# Altium PCB A540R260_Arm6.PcbDoc (part 2 of 2)
Units mm, origin at the board's own origin, x right, y up, seen from the top; angles counter-clockwise.
Board outline 130.45 x 60.2 mm, 4 copper layers (Top Layer, 5V, GND, Bottom Layer), stack 1.741 mm thick; 110 components, 164 nets, 536 pads, 150 vias.
Unrouted connection lines stored in the file: 3.
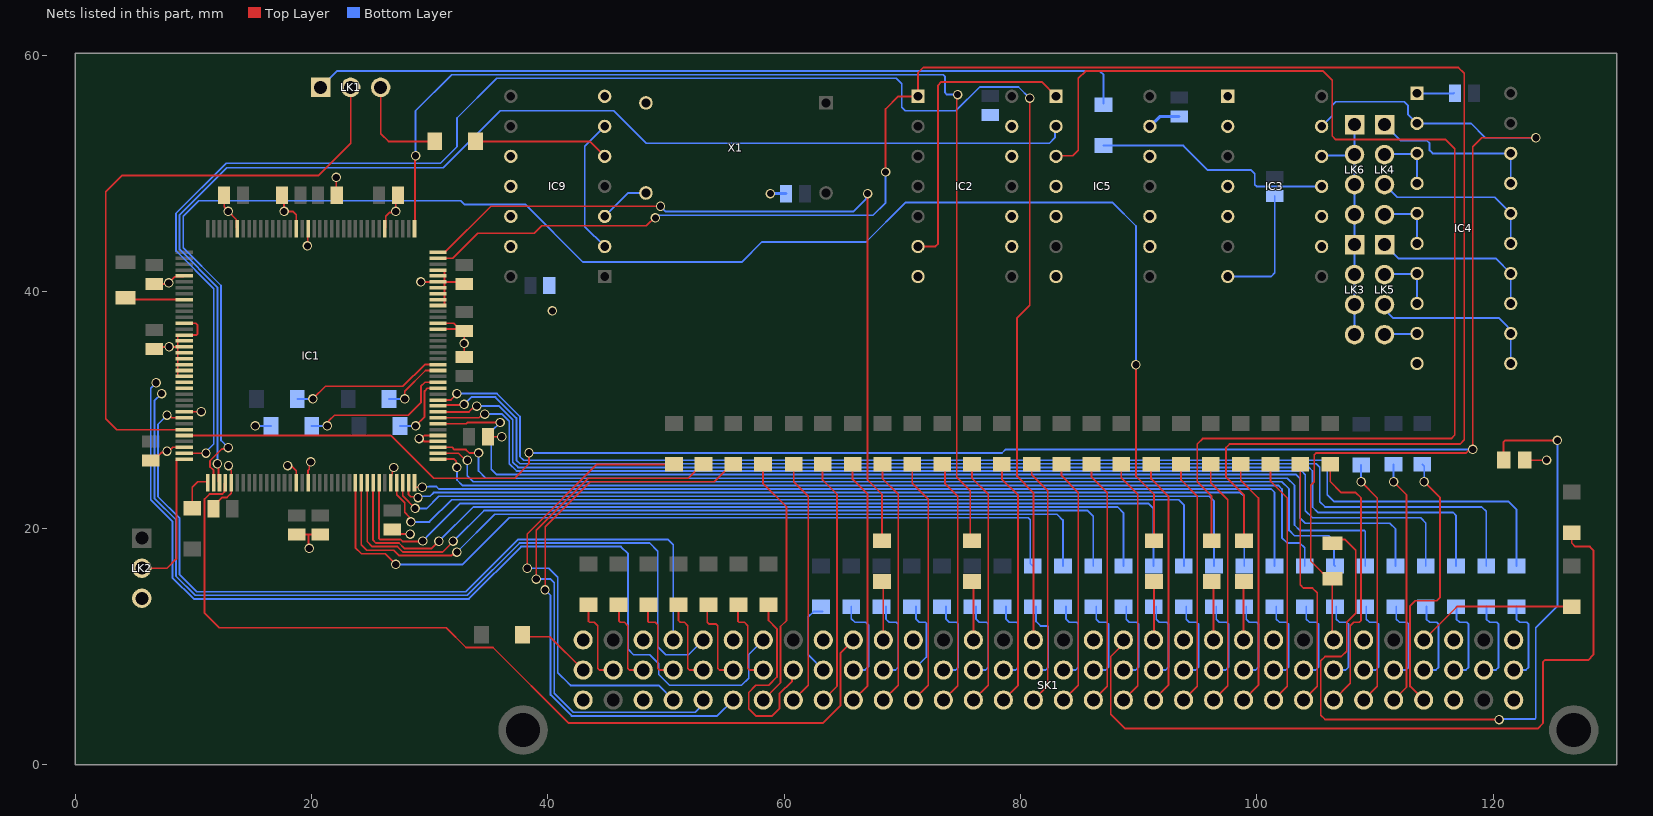
[diagram p4: the nets of this part, all layers, seen from the top]

## Via types
v1: diameter 0.8, hole 0.6, Top Layer to Bottom Layer, 150 vias

## Nets (pads, with @x,y where several pads share a name; then routed paths per layer and width w, separated by ;. In a path a pad name is that pad's centre, name@x,y a point inside that pad or via, vN(x,y) a via of type N, cw(c..) or ccw(c..) an arc to the next point about the centre after c; other vN are vias at no path point) (continued)
D15: IC1.26 R47.2 | length 68.9
  Top Layer w0.152: IC1.26@23.714,23.857 23.714,18.348 24.232,17.831 26.232,17.831 v1(27.127,16.935)
  Bottom Layer w0.152: v1(27.127,16.935) 32.785,16.935 36.728,20.879 80.645,20.879 80.823,20.701 80.823,17.015 R47.2@81.025,16.813
D16: IC1.27 R39.2 | length 70.5
  Top Layer w0.152: IC1.27@24.214,23.857 24.214,18.61 24.689,18.136 26.975,18.136 27.432,17.678 31.829,17.678 32.134,17.983 v1(32.309,17.983)
  Bottom Layer w0.152: v1(32.309,17.983) 35.509,21.184 83.083,21.184 83.583,20.684 R39.2@83.583,16.813
D17: IC1.28 R53.2 | length 72.7
  Top Layer w0.152: IC1.28@24.714,23.857 24.714,18.872 25.146,18.44 27.28,18.44 27.737,17.983 31.09,17.983 31.978,18.871 v1(31.978,18.902)
  Bottom Layer w0.152: v1(31.978,18.902) 32.008,18.902 34.595,21.488 85.674,21.488 86.141,21.021 R53.2@86.141,16.813
D18: IC1.29 R44.2 | length 74.8
  Top Layer w0.152: IC1.29@25.214,23.857 25.214,18.982 25.451,18.745 27.406,18.745 27.863,18.288 30.175,18.288 v1(30.785,18.898)
  Bottom Layer w0.152: v1(30.785,18.898) 33.68,21.793 88.214,21.793 88.7,21.308 R44.2@88.7,16.813
D19: IC1.30 R13.2 | length 76.7
  Top Layer w0.152: IC1.30@25.714,23.857 25.714,19.139 25.804,19.05 27.532,19.05 27.704,18.879 29.375,18.879 v1(29.413,18.917)
  Bottom Layer w0.152: v1(29.413,18.917) 30.052,19.555 32.595,22.098 90.805,22.098 91.258,21.645 R13.2@91.258,16.813
D20: IC1.33 R49.2 | length 75.3
  Top Layer w0.152: IC1.33@27.214,23.857 27.214,22.814 27.889,22.139 27.889,21.336 28.293,20.932 28.293,20.653 v1(28.417,20.529)
  Bottom Layer w0.152: v1(28.417,20.529) 29.977,20.529 31.852,22.403 93.396,22.403 93.816,21.983 R49.2@93.816,16.813
D21: IC1.34 R17.2 | length 76.3
  Top Layer w0.152: IC1.34@27.714,23.857 27.714,22.745 28.761,21.698 v1(28.761,21.669)
  Bottom Layer w0.152: v1(28.761,21.669) 29.746,21.669 30.785,22.708 95.961,22.708 96.374,22.295 R17.2@96.374,16.813
D22: IC1.35 R55.2 | length 78
  Top Layer w0.152: IC1.35@28.214,23.857 28.214,22.84 28.385,22.669 28.932,22.669 v1(29.014,22.587)
  Bottom Layer w0.152: v1(29.014,22.587) 29.138,22.711 30.027,22.711 30.328,23.012 98.603,23.012 98.932,22.683 R55.2@98.932,16.813
D23: IC1.36 R21.2 | length 79.5
  Top Layer w0.152: IC1.36@28.714,23.857 28.788,23.469 v1(29.375,23.469)
  Bottom Layer w0.152: v1(29.375,23.469) 29.954,23.522 30.58,23.522 30.785,23.317 101.194,23.317 101.49,23.021 R21.2@101.49,16.813
D24: IC1.37 R59.2 | length 81.3
  Top Layer w0.152: IC1.37@30.702,25.845 32.067,25.845 32.245,25.667 32.245,25.209 v1(32.309,25.146)
  Bottom Layer w0.152: v1(32.309,25.146) 32.309,24.079 32.766,23.622 101.803,23.622 102.108,23.317 102.108,19.202 102.565,18.745 103.632,18.745 104.048,18.329 R59.2@104.048,16.813
D25: IC1.38 R26.2 | length 84
  Top Layer w0.152: IC1.38@30.702,26.345 32.436,26.345 33.178,25.603 v1@33.223,25.603
  Bottom Layer w0.152: v1(33.186,25.746) 33.186,24.421 33.68,23.927 102.108,23.927 102.718,23.317 102.718,19.812 103.175,19.355 106.07,19.355 106.528,18.898 106.528,16.891 R26.2@106.606,16.813
D26: IC1.39 R62.2 | length 87.2
  Top Layer w0.152: IC1.39@30.702,26.845 31.901,26.845 32.096,26.65 33.065,26.65 33.349,26.365 v1(34.138,26.365)
  Bottom Layer w0.152: v1(34.138,26.365) 34.138,24.841 34.747,24.232 102.565,24.232 103.175,23.622 103.175,20.269 103.632,19.812 109.075,19.812 109.164,19.723 R62.2@109.164,16.813
D27: IC1.43 R32.2 | length 93.3
  Top Layer w0.152: IC1.43@30.702,28.845 33.112,28.845 33.179,28.911 33.223,28.956 35.944,28.956 v1(35.955,28.945)
  Bottom Layer w0.152: v1(35.955,28.945) 35.204,28.194 35.204,24.994 35.662,24.536 103.327,24.536 103.632,24.232 103.632,20.879 104.089,20.422 111.252,20.422 111.722,19.952 R32.2@111.722,16.813
D28: IC1.44 R23.2 | length 95
  Top Layer w0.152: IC1.44@30.702,29.345 34.174,29.345 34.483,29.654 v1(34.659,29.654)
  Bottom Layer w0.152: v1(34.659,29.654) 36.135,29.654 36.728,29.061 36.728,25.466 37.353,24.841 103.784,24.841 104.089,24.536 104.089,21.488 104.699,20.879 113.843,20.879 114.28,20.442 R23.2@114.28,16.813
D29: IC1.45 R38.2 | length 98.3
  Top Layer w0.152: IC1.45@30.702,29.845 33.327,29.845 33.81,30.328 v1(33.985,30.328)
  Bottom Layer w0.152: v1(33.985,30.328) 35.892,30.328 36.153,30.067 ; 36.151,30.069 37.033,29.187 37.033,25.592 37.48,25.146 104.394,25.146 104.699,24.841 104.699,21.793 105.156,21.336 116.586,21.336 116.838,21.084 R38.2@116.838,16.813
D30: IC1.46 R28.2 | length 101.4
  Top Layer w0.152: IC1.46@30.702,30.345 30.77,30.412 32.851,30.412 v1(32.918,30.48)
  Bottom Layer w0.152: v1(32.918,30.48) 33.528,31.09 35.561,31.09 35.606,31.045 37.338,29.313 37.338,25.756 37.643,25.451 105.004,25.451 105.308,25.146 105.308,22.25 105.766,21.793 119.024,21.793 119.396,21.421 R28.2@119.396,16.813
D31: IC1.47 R34.2 | length 103.8
  Top Layer w0.152: IC1.47@30.702,30.845 31.793,30.845 32.309,31.361 v1(32.309,31.394)
  Bottom Layer w0.152: v1(32.309,31.394) 35.688,31.394 37.643,29.439 37.643,26.06 37.948,25.756 105.613,25.756 105.943,25.425 105.943,22.835 106.528,22.25 121.31,22.25 121.954,21.607 R34.2@121.954,16.813
Dbe: IC1.4 SK1.C23 | length 76.7
  Top Layer w0.152: IC1.4@12.714,23.857 12.641,23.783 12.641,23.072 12.459,22.891 11.378,22.891 10.958,22.47 10.958,12.816 12.192,11.582 31.394,11.582 33.071,9.906 35.357,9.906 41.758,3.505 63.246,3.505 64.77,5.029 64.77,9.464 SK1.C23@65.847,10.541
FCLK: IC1.139 LK1.2 | length 53.4
  Top Layer w0.152: IC1.139@9.226,28.345 8.565,28.327 7.468,28.327 cw(c7.468,28.956) 7.466,28.327 5.486,28.327 cw(c5.486,28.956) 5.483,28.327 3.524,28.327 2.591,29.261 2.591,48.463 3.962,49.835 20.574,49.835 23.317,52.578 LK1.2@23.317,57.302
FiqN: IC1.131 SK1.C26 | length 82.9
  Bottom Layer w0.152: v1(6.858,32.309) 6.401,31.852 6.401,22.403 8.23,20.574 8.23,15.823 10.032,14.021 33.319,14.021 37.738,18.44 46.177,18.44 46.787,17.831 46.787,9.754 47.244,9.296 48.616,9.296 49.378,8.534 49.378,7.62 50.292,6.706 56.388,6.706 56.998,7.315 56.998,9.312 SK1.C26@58.227,10.541
freeFCLK: LK1.3 R98.2 | length 8.8
  Top Layer w0.152: LK1.3@25.857,57.302 25.857,53.391 26.518,52.73 R98.2@30.431,52.73
GND: C3.1 C4.1 C5.1 C6.2 C7.1 C10.1 C13.1 C15.1 C16.1 C17.1 C18.1 C19.1 C20.1 C21.1 C22.1 C23.1 C24.1 C25.1 Cz2.1 Cz3.1 Cz4.2 Cz5.1 IC1.5 IC1.16 IC1.18 IC1.32 IC1.40 IC1.41 IC1.59 IC1.60 IC1.63 IC1.64 IC1.65 IC1.66 IC1.67 IC1.68 IC1.69 IC1.78 IC1.91 IC1.93 IC1.103 IC1.113 IC1.121 IC1.123 IC1.124 IC1.125 IC1.126 IC1.127 IC1.128 IC1.129 IC1.130 IC1.136 IC1.142 IC2.7 IC2.9 IC2.10 IC2.12 IC2.13 IC3.1 IC3.2 IC3.4 IC3.5 IC3.7 IC3.9 IC3.10 IC4.1 IC4.10 IC5.4 IC5.5 IC5.7 IC5.9 IC5.10 IC5.12 IC5.13 IC9.7 IC9.10 IC9.11 IC9.12 IC9.13 LK2.3 R69.1 SK1.A1 SK1.A3 SK1.A30 SK1.A32 SK1.C1 SK1.C3 SK1.C6 SK1.C9 SK1.C12 SK1.C15 SK1.C21 SK1.C24 SK1.C27 SK1.C30 SK1.C32 X1.2 | length 85.6
  Top Layer w0.152: C17.1@6.401,25.718 6.835,26.151 7.06,26.151 7.302,26.394 7.648,26.394 v1(7.772,26.518) 7.933,26.518 8.26,26.845 IC1.142@9.226,26.845 ; C16.1@6.706,35.166 6.884,35.345 IC1.125@8.687,35.345 ; C13.1@6.706,40.653 7.836,40.653 7.925,40.742 v1(7.925,40.754) 8.442,41.271 9.153,41.271 IC1.113@9.226,41.345 ; IC1.136@9.226,29.845 9.239,29.858 10.655,29.858 v1(10.668,29.87) ; IC1.130@9.226,32.845 8.761,32.845 8.687,32.919 IC1.129@8.687,33.419 ; IC1.129@9.226,33.345 8.761,33.345 IC1.129@8.687,33.419 ; IC1.125@9.226,35.345 IC1.125@8.687,35.345 ; IC1.121@9.226,37.345 10.204,37.345 10.363,37.186 10.363,36.434 10.274,36.345 IC1.123@9.226,36.345 8.76,36.345 8.687,36.271 IC1.125@8.687,35.345 ; C18.1@11.697,21.641 11.697,21.866 12.417,22.586 12.674,22.586 12.692,22.604 12.851,22.604 13.214,22.968 13.214,24.884 12.979,25.119 v1(12.979,25.294) ; C7.1@12.611,48.158 12.611,47.195 12.954,46.852 v1(12.954,46.806) 13.641,46.117 13.641,45.407 IC1.103@13.714,45.333 ; C5.1@17.488,48.158 17.678,47.968 v1(17.678,46.806) ; v1(17.678,46.806) 17.697,46.787 18.44,46.787 18.714,46.513 IC1.93@18.714,45.333 ; v1(17.983,25.298) 18.107,25.174 18.412,25.174 18.714,24.872 IC1.16@18.714,23.857 ; C19.1@18.745,19.469 19.736,19.469 ; v1(19.66,43.891) 19.687,43.919 19.687,45.305 IC1.91@19.714,45.333 ; IC1.18@19.714,23.857 19.714,24.903 19.815,25.004 19.815,25.483 v1(19.939,25.607) ; v1(19.812,18.288) 19.736,18.364 19.736,19.469 ; C20.1@20.726,19.469 19.736,19.469 ; v1(22.098,49.682) 22.098,48.196 C4.1@22.136,48.158 ; IC1.78@26.214,45.333 26.288,45.407 26.288,46.405 26.607,46.723 27.045,46.723 v1(27.127,46.806) 27.127,47.968 C3.1@27.318,48.158 ; IC1.32@26.714,23.857 26.788,24.518 v1(26.963,25.137) ; C21.1@26.822,19.888 27.204,19.507 v1(28.346,19.507) ; v1(29.108,27.584) v1@29.284,27.584 ; v1(29.261,40.843) IC1.67@31.241,40.844 ; IC1.40@30.702,27.345 29.523,27.345 v1@29.284,27.584 ; IC1.41@30.702,27.845 29.544,27.845 v1@29.284,27.584 ; IC1.59@30.702,36.845 C24.1@32.539,36.845 ; IC1.60@30.702,37.345 31.692,37.345 31.699,37.338 32.046,37.338 C24.1@32.539,36.845 ; IC1.69@30.702,41.845 31.168,41.845 31.242,41.771 31.242,41.345 IC1.67@31.242,40.845 ; 31.242,39.014 31.242,39.345 31.242,39.845 31.242,40.345 IC1.67@31.242,40.845 ; C23.1@32.918,34.48 v1(32.918,35.643) 32.918,35.662 C24.1@32.918,36.69 32.693,36.69 C24.1@32.539,36.845 ; C25.1@32.918,40.653 32.726,40.845 IC1.67@31.242,40.845 ; C22.1@34.938,27.737 v1(36.1,27.737) ; C6.2@122.668,25.756 v1(124.511,25.756) ; IC1.129@8.687,33.419 IC1.125@8.687,35.345
  Bottom Layer w0.152: v1(15.24,28.651) R69.1@16.563,28.651 ; IC3.7@97.528,41.3 101.194,41.3 101.498,41.605 C15.1@101.498,48.12 ; IC4.1@113.538,56.794 116.65,56.794 C10.1@116.7,56.845
  Bottom Layer w0.254: v1(58.826,48.311) Cz3.1@60.16,48.311 ; IC5.13@90.94,54 91.765,54.826 Cz5.1@93.421,54.826
  other v1: 7.95,35.35 40.383,38.384
IrqN: IC1.132 SK1.C28 | length 72.7
  Bottom Layer w0.152: v1(7.315,31.394) 6.706,30.785 6.706,22.529 8.534,20.7 8.534,15.95 10.159,14.326 33.193,14.326 37.612,18.745 48.616,18.745 49.301,18.059 49.301,9.982 49.987,9.296 51.902,9.296 SK1.C28@53.147,10.541
ixSEQ: IC5.3 R40.2 | length 100.8
  Top Layer w0.152: IC5.3@83,51.46 83.05,51.511 84.43,51.511 84.887,51.968 84.887,58.064 85.496,58.674 105.613,58.674 106.375,57.912 106.375,53.188 106.68,52.883 115.976,52.883 116.738,52.121 116.738,27.889 116.434,27.584 95.402,27.584 94.945,27.127 94.945,23.927 96.164,22.708 R40.2@96.164,18.946
LOCK: IC1.73 R63.2 | length 97.1
  Top Layer w0.152: IC1.73@28.714,45.333 28.759,45.377 28.759,51.467 v1(28.804,51.511) ; v1(74.676,56.693) 74.598,56.615 74.598,24.31 75.743,23.165 75.743,19.099 R63.2@75.895,18.946
  Bottom Layer w0.152: v1@28.804,51.359 28.804,55.321 31.852,58.369 73.457,58.369 73.609,58.217 73.609,56.845 73.762,56.693 v1(74.676,56.693)
Mclk: IC1.140 IC3.13 IC4.2 R2.1 SK1.C7 | length 195
  Top Layer w0.152: IC1.140@9.226,27.845 11.386,27.845 26.714,27.845 26.751,27.808 30.328,24.232 37.186,24.232 38.405,25.451 v1(38.405,26.384) ; SK1.C7@106.487,10.541 106.375,10.653 R2.1@106.375,15.721 105.876,16.22 105.548,16.22 104.546,17.221 104.546,23.622 104.851,23.927 104.851,26.213 105.004,26.365 117.697,26.365 117.878,26.546 118.138,26.546 v1(118.262,26.67) 118.262,52.273 119.024,53.035 v1(123.596,53.035)
  Bottom Layer w0.152: v1(38.405,26.384) 38.424,26.365 39.608,26.365 39.734,26.365 78.424,26.365 78.729,26.67 v1(118.262,26.67) ; IC3.13@105.468,54 106.375,54.907 106.375,55.778 106.68,56.083 112.471,56.083 112.776,55.778 112.776,55.016 IC4.2@113.538,54.254 118.11,54.254 119.329,53.035 v1(123.596,53.035)
MSE: IC1.1 R76.1 | length 3.3
  Top Layer w0.152: R76.1@9.906,21.689 9.906,23.47 10.363,23.927 11.144,23.927 IC1.1@11.214,23.857
nBW: IC1.72 R60.2 | length 68.9
  Top Layer w0.152: IC1.72@30.702,43.345 31.29,43.345 35.189,47.244 v1(49.53,47.244) ; v1(67.056,48.311) 67.056,24.079 68.275,22.86 R60.2@68.275,18.946
  Bottom Layer w0.152: v1(49.53,47.244) 49.987,46.787 65.837,46.787 66.932,47.882 66.932,48.187 v1(67.056,48.311) v1@66.98,48.235
NetC6_1: C6.1 R2.2 | length 67.3
  Top Layer w0.152: R2.2@106.375,18.721 106.704,19.05 107.442,19.05 108.356,18.136 108.356,12.802 107.594,12.04 107.594,9.601 107.137,9.144 105.766,9.144 105.401,8.78 105.401,4.174 105.766,3.81 v1@120.427,3.81 ; C6.1@120.868,25.756 120.853,25.77 120.853,27.28 121.006,27.432 v1(125.425,27.432)
  Bottom Layer w0.152: v1@120.396,3.848 123.507,3.848 123.596,3.938 123.596,11.582 125.425,13.411 v1(125.425,27.432)
  other v1: 120.498,3.806
NetIC1_117: IC1.117 R99.2 | length 5
  Top Layer w0.152: R99.2@4.267,39.496 4.418,39.345 IC1.117@9.226,39.345
NetIC3_12: IC3.12 LK3.1 LK3.2 LK3.3 LK3.4 LK6.1 LK6.2 LK6.3 LK6.4 | length 20.6
  Bottom Layer w0.152: IC3.12@105.468,51.46 105.545,51.537 108.179,51.537 LK6.2@108.255,51.613 ; LK3.4@108.255,36.373 LK3.3@108.255,38.913 LK3.2@108.255,41.453 LK3.1@108.255,43.993 LK6.4@108.255,46.533 LK6.3@108.255,49.073 LK6.2@108.255,51.613 ; LK6.1@108.255,54.153 LK6.2@108.255,51.613
NetIC4_3: IC4.3 IC4.4 LK4.2 | length 5.3
  Bottom Layer w0.152: LK4.2@110.795,51.613 110.846,51.664 113.487,51.664 IC4.3@113.538,51.714 IC4.4@113.538,49.174
NetIC4_5: IC4.5 IC4.6 LK4.4 | length 5.3
  Bottom Layer w0.152: LK4.4@110.795,46.533 110.846,46.584 113.487,46.584 IC4.5@113.538,46.634 IC4.6@113.538,44.094
NetIC4_7: IC4.7 IC4.8 LK5.2 | length 5.3
  Bottom Layer w0.152: LK5.2@110.795,41.453 110.846,41.504 113.487,41.504 IC4.7@113.538,41.554 IC4.8@113.538,39.014
NetIC4_9: IC4.9 LK5.4 | length 2.8
  Bottom Layer w0.152: LK5.4@110.795,36.373 110.846,36.424 113.487,36.424 IC4.9@113.538,36.474
NetIC4_11: IC4.11 IC4.12 LK5.3 | length 14.7
  Bottom Layer w0.152: LK5.3@110.795,38.913 110.795,38.508 111.178,38.124 111.178,38.111 111.494,37.795 120.459,37.795 121.22,37.034 121.22,36.997 121.478,36.739 IC4.11@121.478,33.934
NetIC4_13: IC4.13 IC4.14 LK5.1 | length 14.2
  Bottom Layer w0.152: LK5.1@110.795,43.993 111.963,42.824 120.208,42.824 IC4.14@121.478,41.554 IC4.13@121.478,39.014
NetIC4_15: IC4.15 IC4.16 LK4.3 | length 14.2
  Bottom Layer w0.152: LK4.3@110.795,49.073 111.862,48.006 120.106,48.006 IC4.16@121.478,46.634 IC4.15@121.478,44.094
NetIC4_17: IC4.17 IC4.18 LK4.1 | length 14.6
  Bottom Layer w0.152: LK4.1@110.795,54.153 112.156,52.792 114.391,52.792 114.605,52.578 114.605,51.968 114.859,51.714 IC4.18@121.478,51.714 IC4.17@121.478,49.174
NetIC9_2: IC9.2 IC9.6 | length 11.5
  Bottom Layer w0.152: IC9.2@44.806,43.84 43.129,45.517 43.129,52.324 IC9.6@44.806,54
NetIC9_5: IC9.5 R98.1 | length 11.5
  Top Layer w0.152: R98.1@33.881,52.73 43.536,52.73 IC9.5@44.806,51.46
nHW: R1.1 SK1.C4 | length 13.1
  Top Layer w0.152: SK1.C4@114.107,10.541 116.929,13.363 R1.1@126.035,13.363
nMREQ: IC1.2 R50.2 | length 138.6
  Top Layer w0.152: IC1.2@11.714,23.857 11.714,24.887 11.411,25.19 11.411,25.711 12.398,26.698 12.83,26.698 v1(12.954,26.822) ; v1(89.764,33.833) 89.764,24.384 91.288,22.86 R50.2@91.288,18.946
  Bottom Layer w0.152: v1(12.954,26.822) 12.344,27.432 12.344,40.538 9.144,43.739 9.144,46.382 10.463,47.701 32.614,47.701 32.918,47.396 38.1,47.396 42.977,42.52 56.413,42.52 58.109,44.215 66.923,44.215 70.256,47.549 87.782,47.549 89.764,45.568 v1(89.764,33.833)
nRESET: IC1.137 SK1.C29 | length 68.5
  Top Layer w0.152: v1(7.772,29.566) 7.948,29.566 8.168,29.345 IC1.137@9.226,29.345
  Bottom Layer w0.152: v1(7.772,29.566) 7.01,28.804 7.01,22.655 8.839,20.827 8.839,16.076 10.285,14.63 33.066,14.63 37.486,19.05 50.14,19.05 50.607,18.583 SK1.C29@50.607,10.541
nRW: IC1.71 IC2.1 R56.2 | length 159.5
  Top Layer w0.152: IC1.71@30.702,42.845 31.942,42.845 34.055,44.958 38.862,44.958 39.491,45.587 48.33,45.587 v1@49.073,46.33 ; v1(68.58,50.14) 68.58,55.474 69.647,56.54 IC2.1@71.316,56.54 71.316,58.514 71.78,58.979 117.043,58.979 117.543,58.479 117.543,27.474 117.196,27.127 97.688,27.127 97.384,26.822 97.384,24.321 97.473,24.232 98.908,22.797 R56.2@98.908,18.946
  Bottom Layer w0.152: v1(49.097,46.25) 49.33,46.482 67.513,46.482 68.58,47.549 v1(68.58,50.14)
nTRST: IC1.50 R69.2 | length 13.2
  Top Layer w0.152: v1(21.336,28.651) 21.46,28.775 21.46,29.08 21.946,29.566 28.194,29.566 29.261,30.632 29.261,32.004 29.602,32.345 IC1.50@30.702,32.345
  Bottom Layer w0.152: R69.2@20.013,28.651 v1(21.336,28.651)
nVIDC_Write_maybe: IC2.6 IC5.1 | length 25.8
  Top Layer w0.152: IC2.6@71.316,43.84 72.796,43.84 73,44.044 73,57.455 73.304,57.76 81.78,57.76 IC5.1@83,56.54
nWAIT: IC1.143 SK1.C17 | length 152.5
  Top Layer w0.152: IC1.143@9.226,26.345 9.228,26.347 11.073,26.347 v1(11.075,26.348) ; v1(80.772,56.388) 80.772,38.862 79.705,37.795 79.705,24.384 81.087,23.002 SK1.C17@81.087,10.541
  Bottom Layer w0.152: v1@10.973,26.365 11.735,27.127 11.735,40.26 8.534,43.46 8.534,46.634 12.783,50.883 30.918,50.883 32.309,52.273 32.309,54.712 35.662,58.064 69.494,58.064 69.952,57.607 69.952,55.626 70.256,55.321 74.524,55.321 76.536,57.334 79.826,57.334 v1(80.772,56.388)
OscClk: IC9.3 X1. | length 4.3
  Bottom Layer w0.152: IC9.3@44.806,46.38 46.792,48.367 X1.@48.297,48.367
SEQ: IC1.3 IC5.2 | length 104.1
  Top Layer w0.152: v1(12.04,25.451) 12.141,25.35 12.141,23.931 IC1.3@12.214,23.857
  Bottom Layer w0.152: v1(12.04,25.451) 12.04,40.386 8.839,43.586 8.839,46.508 12.839,50.508 31.153,50.508 35.966,55.321 45.568,55.321 48.311,52.578 82.448,52.578 82.906,53.035 82.906,53.906 IC5.2@83,54
SNA: IC1.144 LK2.2 | length 12.3
  Top Layer w0.152: LK2.2@5.639,16.612 7.772,16.612 8.565,17.404 8.565,25.771 8.639,25.845 IC1.144@9.226,25.845
syncFCLK: LK1.1 R52.1 | length 69.4
  Bottom Layer w0.152: LK1.1@20.777,57.302 22.149,58.674 86.716,58.674 87.02,58.369 R52.1@87.02,55.931
TCK: IC1.53 R45.2 | length 13.1
  Top Layer w0.152: v1(20.117,30.937) 21.184,32.004 27.737,32.004 29.578,33.845 IC1.53@30.702,33.845
  Bottom Layer w0.152: R45.2@18.794,30.937 v1(20.117,30.937)
TDI: IC1.49 R68.2 | length 5.8
  Top Layer w0.152: v1(28.804,28.651) 29.566,29.413 29.566,31.603 29.807,31.845 IC1.49@30.702,31.845
  Bottom Layer w0.152: R68.2@27.481,28.651 v1(28.804,28.651)
TMS: IC1.52 R83.2 | length 5.5
  Top Layer w0.152: v1(27.889,30.937) 27.889,31.591 29.643,33.345 IC1.52@30.702,33.345
  Bottom Layer w0.152: R83.2@26.566,30.937 v1(27.889,30.937)
xA0: R_A0.1 SK1.A4 | length 23.2
  Top Layer w0.152: SK1.A4@114.107,5.461 112.959,6.609 112.959,13.442 113.386,13.868 115.214,13.868 115.495,14.149 115.495,22.579 v1(114.148,23.927)
  Bottom Layer w0.152: R_A0.1@113.995,25.402 114.148,25.25 v1(114.148,23.927)
xA1: R65.1 SK1.A5 | length 20.8
  Top Layer w0.152: v1(111.557,23.927) 112.652,22.832 112.652,6.546 SK1.A5@111.567,5.461
  Bottom Layer w0.152: v1(111.557,23.927) R65.1@111.557,25.402
xA2: R8.1 SK1.A6 | length 20.9
  Top Layer w0.152: v1(108.814,23.927) 110.185,22.555 110.185,6.619 SK1.A6@109.027,5.461
  Bottom Layer w0.152: v1(108.814,23.927) R8.1@108.814,25.354
xA3: R29.1 SK1.A7 | length 23
  Top Layer w0.152: R29.1@106.197,25.402 106.197,23.952 107.137,23.012 108.356,23.012 108.814,22.555 108.814,12.192 108.661,12.04 108.204,12.04 107.899,11.735 107.899,6.873 SK1.A7@106.487,5.461
xA4: R10.1 SK1.A8 | length 21.5
  Top Layer w0.152: R10.1@103.672,25.402 103.672,15.2 103.937,14.935 104.699,14.935 105.096,14.538 105.096,6.61 SK1.A8@103.947,5.461
xA5: R35.1 SK1.A9 | length 21
  Top Layer w0.152: R35.1@101.146,25.402 101.146,23.974 102.565,22.555 102.565,6.619 SK1.A9@101.407,5.461
xA6: R14.1 SK1.A10 | length 21.1
  Top Layer w0.152: R14.1@98.621,25.402 98.621,24.061 100.127,22.555 100.127,6.721 SK1.A10@98.867,5.461
xA7: R41.1 SK1.A11 | length 21
  Top Layer w0.152: R41.1@96.095,25.402 96.095,24.238 96.095,24.148 96.095,23.843 97.536,22.403 97.536,6.67 SK1.A11@96.327,5.461
xA8: Rx9.1 SK1.A12 | length 21
  Top Layer w0.152: Rx9.1@93.57,25.402 93.57,24.083 94.945,22.708 94.945,6.619 SK1.A12@93.787,5.461
xA9: R46.1 SK1.A13 | length 21.1
  Top Layer w0.152: R46.1@91.044,25.402 91.044,24.17 92.507,22.708 92.507,6.721 SK1.A13@91.247,5.461
xA10: R24.1 SK1.A14 | length 21
  Top Layer w0.152: R24.1@88.519,25.402 88.519,24.257 89.916,22.86 89.916,6.67 SK1.A14@88.707,5.461
xA11: R5z.1 SK1.A15 | length 21
  Top Layer w0.152: R5z.1@85.993,25.402 85.993,24.344 87.325,23.012 87.325,6.619 SK1.A15@86.167,5.461
xA12: R30.1 SK1.A16 | length 21.1
  Top Layer w0.152: R30.1@83.468,25.402 83.468,24.431 84.887,23.012 84.887,6.721 SK1.A16@83.627,5.461
xA13: R57.1 SK1.A17 | length 21
  Top Layer w0.152: R57.1@80.943,25.402 80.943,24.518 82.296,23.165 82.296,6.67 SK1.A17@81.087,5.461
xA14: R36.1 SK1.A18 | length 21
  Top Layer w0.152: R36.1@78.417,25.402 78.417,24.148 79.785,22.78 79.785,6.699 SK1.A18@78.547,5.461
xA15: R61.1 SK1.A19 | length 21
  Top Layer w0.152: R61.1@75.892,25.402 75.892,24.235 77.267,22.86 77.267,6.721 SK1.A19@76.007,5.461
xA16: R5.1 SK1.A20 | length 21
  Top Layer w0.152: R5.1@73.366,25.402 73.609,25.159 73.609,23.774 74.676,22.708 74.676,6.67 SK1.A20@73.467,5.461
xA17: R64.1 SK1.A21 | length 21
  Top Layer w0.152: R64.1@70.841,25.402 70.841,23.8 72.18,22.46 72.18,6.714 SK1.A21@70.927,5.461
xA18: R7.1 SK1.A22 | length 21
  Top Layer w0.152: R7.1@68.315,25.402 68.315,24.192 69.647,22.86 69.647,6.721 SK1.A22@68.387,5.461
xA19: R66.1 SK1.A23 | length 21
  Top Layer w0.152: R66.1@65.79,25.402 65.79,24.126 67.056,22.86 67.056,6.67 SK1.A23@65.847,5.461
xA20: R9.1 SK1.A24 | length 20.9
  Top Layer w0.152: R9.1@63.264,25.402 63.246,25.384 63.246,24.079 64.465,22.86 64.465,6.619 SK1.A24@63.307,5.461
xA21: R67.1 SK1.A25 | length 21
  Top Layer w0.152: SK1.A25@60.767,5.461 62.027,6.721 62.027,22.708 60.808,23.927 R67.1@60.808,25.402
xA22: R11.1 SK1.A26 | length 21.6
  Top Layer w0.152: R11.1@58.213,25.402 58.217,25.399 58.217,23.774 60.198,21.793 60.198,12.192 59.685,11.679 59.685,6.919 SK1.A26@58.227,5.461
xA23: R3.1 SK1.A27 | length 49.3
  Top Layer w0.152: v1(39.757,14.783) 39.776,14.802 39.776,20.117 43.586,23.927 54.087,23.927 55.563,25.402 R3.1@55.688,25.402
  Bottom Layer w0.152: v1(39.757,14.783) 40.234,14.307 40.234,5.891 42.01,4.115 54.341,4.115 SK1.A27@55.687,5.461
xA24: R15.1 SK1.A28 | length 45.5
  Top Layer w0.152: v1(39.014,15.697) 39.014,19.838 43.408,24.232 51.867,24.232 53.037,25.402 R15.1@53.162,25.402
  Bottom Layer w0.152: v1(39.014,15.697) 40.234,15.697 40.538,15.392 40.538,6.018 42.136,4.42 52.489,4.42 53.147,5.078 SK1.A28@53.147,5.461
xA25: R4.1 SK1.A29 | length 39.5
  Top Layer w0.152: v1(38.252,16.612) 38.252,19.507 44.147,25.402 R4.1@50.673,25.402
  Bottom Layer w0.152: v1(38.252,16.612) 40.081,16.612 40.843,15.85 40.843,7.772 41.758,6.858 41.922,6.694 49.374,6.694 SK1.A29@50.607,5.461
xD0: R43.1 SK1.B32 | length 6.4
  Top Layer w0.152: R43.1@37.844,10.973 37.996,10.82 40.168,10.82 SK1.B32@42.987,8.001
xD1: R12.1 SK1.B31 | length 7.3
  Top Layer w0.152: R12.1@43.434,13.515 43.434,12.129 43.523,12.04 43.941,12.04 44.221,11.76 44.221,8.142 44.361,8.001 SK1.B31@45.527,8.001
xD2: R48.1 SK1.B30 | length 7.3
  Top Layer w0.152: R48.1@45.974,13.515 46.025,13.464 46.025,12.129 46.114,12.04 46.482,12.04 46.761,11.761 46.761,8.142 46.901,8.001 SK1.B30@48.067,8.001
xD3: R16.1 SK1.B29 | length 7.4
  Top Layer w0.152: R16.1@48.514,13.515 48.463,13.464 48.463,12.129 48.552,12.04 49.073,12.04 49.301,11.812 49.301,11.76 49.301,8.142 49.441,8.001 SK1.B29@50.607,8.001
xD4: R54.1 SK1.B28 | length 7.3
  Top Layer w0.152: R54.1@51.054,13.515 51.054,12.192 51.206,12.04 51.561,12.04 51.841,11.76 51.841,8.142 51.981,8.001 SK1.B28@53.147,8.001
xD5: R20.1 SK1.B27 | length 7.5
  Top Layer w0.152: R20.1@53.594,13.515 53.492,13.413 53.492,12.04 53.645,11.887 54.253,11.887 54.381,11.76 54.381,8.142 54.521,8.001 SK1.B27@55.687,8.001
xD6: R58.1 SK1.B26 | length 7.4
  Top Layer w0.152: R58.1@56.134,13.515 56.083,13.464 56.083,12.129 56.172,12.04 56.641,12.04 56.921,11.76 56.921,8.142 57.061,8.001 SK1.B26@58.227,8.001
xD7: R25.1 SK1.B25 | length 17.6
  Top Layer w0.152: R25.1@58.674,13.515 58.674,12.192 59.38,11.486 59.38,7.412 58.674,6.706 57.607,6.706 56.998,6.096 56.998,4.724 57.607,4.115 58.979,4.115 59.588,4.724 59.588,5.975 60.665,7.052 60.665,7.899 SK1.B25@60.767,8.001
xD8: R18.1 SK1.B24 | length 6.4
  Bottom Layer w0.152: R18.1@63.246,12.954 62.484,12.954 62.027,12.497 62.027,9.281 SK1.B24@63.307,8.001
xD9: R31.1 SK1.B23 | length 7.6
  Bottom Layer w0.152: R31.1@65.677,13.363 65.677,12.352 65.989,12.04 66.904,12.04 67.142,11.801 67.142,8.316 66.827,8.001 SK1.B23@65.847,8.001
xD10: R22.1 SK1.B22 | length 7.3
  Bottom Layer w0.152: SK1.B22@68.387,8.001 69.418,8.001 69.647,8.23 69.647,11.887 69.494,12.04 68.885,12.04 68.614,12.31 R22.1@68.614,13.363
xD11: R37.1 SK1.B21 | length 6.5
  Bottom Layer w0.152: SK1.B21@70.927,8.001 72.036,9.11 72.036,11.95 71.947,12.04 71.425,12.04 71.154,12.31 R37.1@71.154,13.363
xD12: R27.1 SK1.B20 | length 7.3
  Bottom Layer w0.152: SK1.B20@73.467,8.001 74.498,8.001 74.727,8.23 74.727,11.887 74.574,12.04 73.965,12.04 73.694,12.31 R27.1@73.694,13.363
xD13: R42.1 SK1.B19 | length 7.3
  Bottom Layer w0.152: SK1.B19@76.007,8.001 77.038,8.001 77.267,8.23 77.267,11.887 77.114,12.04 76.505,12.04 76.234,12.31 R42.1@76.234,13.363
xD14: R33.1 SK1.B18 | length 7.3
  Bottom Layer w0.152: SK1.B18@78.547,8.001 79.578,8.001 79.807,8.23 79.807,11.887 79.654,12.04 79.045,12.04 78.774,12.31 R33.1@78.774,13.363
xD15: R47.1 SK1.B17 | length 7.2
  Bottom Layer w0.152: SK1.B17@81.087,8.001 82.118,8.001 82.347,8.23 82.347,11.646 82.258,11.735 81.686,11.735 81.314,12.107 R47.1@81.314,13.363
xD16: R39.1 SK1.B16 | length 7.3
  Bottom Layer w0.152: SK1.B16@83.627,8.001 84.658,8.001 84.887,8.23 84.887,11.887 84.734,12.04 84.125,12.04 83.854,12.31 R39.1@83.854,13.363
xD17: R53.1 SK1.B15 | length 7.3
  Bottom Layer w0.152: SK1.B15@86.167,8.001 87.198,8.001 87.427,8.23 87.427,11.887 87.274,12.04 86.665,12.04 86.394,12.31 R53.1@86.394,13.363
xD18: R44.1 SK1.B14 | length 7.3
  Bottom Layer w0.152: SK1.B14@88.707,8.001 89.738,8.001 89.967,8.23 89.967,11.887 89.814,12.04 89.205,12.04 88.934,12.31 R44.1@88.934,13.363
xD19: R13.1 SK1.B13 | length 7.3
  Bottom Layer w0.152: SK1.B13@91.247,8.001 92.278,8.001 92.507,8.23 92.507,11.887 92.354,12.04 91.745,12.04 91.474,12.31 R13.1@91.474,13.363
xD20: R49.1 SK1.B12 | length 7.3
  Bottom Layer w0.152: SK1.B12@93.787,8.001 94.818,8.001 95.047,8.23 95.047,11.887 94.894,12.04 94.285,12.04 94.014,12.31 R49.1@94.014,13.363
xD21: R17.1 SK1.B11 | length 7.3
  Bottom Layer w0.152: SK1.B11@96.327,8.001 97.358,8.001 97.587,8.23 97.587,11.887 97.434,12.04 96.825,12.04 96.554,12.31 R17.1@96.554,13.363
xD22: R55.1 SK1.B10 | length 7.3
  Bottom Layer w0.152: SK1.B10@98.867,8.001 99.898,8.001 100.127,8.23 100.127,11.887 99.974,12.04 99.365,12.04 99.094,12.31 R55.1@99.094,13.363
xD23: R21.1 SK1.B9 | length 7.3
  Bottom Layer w0.152: SK1.B9@101.407,8.001 102.438,8.001 102.667,8.23 102.667,11.887 102.514,12.04 101.905,12.04 101.634,12.31 R21.1@101.634,13.363
xD24: R59.1 SK1.B8 | length 7.3
  Bottom Layer w0.152: SK1.B8@103.947,8.001 104.978,8.001 105.207,8.23 105.207,11.887 105.054,12.04 104.445,12.04 104.174,12.31 R59.1@104.174,13.363
xD25: R26.1 SK1.B7 | length 7.3
  Bottom Layer w0.152: SK1.B7@106.487,8.001 107.518,8.001 107.747,8.23 107.747,11.887 107.594,12.04 106.985,12.04 106.714,12.31 R26.1@106.714,13.363
xD26: R62.1 SK1.B6 | length 7.3
  Bottom Layer w0.152: SK1.B6@109.027,8.001 110.058,8.001 110.287,8.23 110.287,11.887 110.134,12.04 109.525,12.04 109.254,12.31 R62.1@109.254,13.363
xD27: R32.1 SK1.B5 | length 7.3
  Bottom Layer w0.152: SK1.B5@111.567,8.001 112.598,8.001 112.827,8.23 112.827,11.887 112.674,12.04 112.065,12.04 111.794,12.31 R32.1@111.794,13.363
xD28: R23.1 SK1.B4 | length 7.3
  Bottom Layer w0.152: SK1.B4@114.107,8.001 115.138,8.001 115.367,8.23 115.367,11.887 115.214,12.04 114.605,12.04 114.334,12.31 R23.1@114.334,13.363
xD29: R38.1 SK1.B3 | length 7.3
  Bottom Layer w0.152: SK1.B3@116.647,8.001 117.678,8.001 117.907,8.23 117.907,11.887 117.754,12.04 117.145,12.04 116.874,12.31 R38.1@116.874,13.363
xD30: R28.1 SK1.B2 | length 7.3
  Bottom Layer w0.152: SK1.B2@119.187,8.001 120.218,8.001 120.447,8.23 120.447,11.887 120.294,12.04 119.685,12.04 119.414,12.31 R28.1@119.414,13.363
xD31: R34.1 SK1.B1 | length 7.3
  Bottom Layer w0.152: SK1.B1@121.727,8.001 122.758,8.001 122.987,8.23 122.987,11.887 122.834,12.04 122.225,12.04 121.954,12.31 R34.1@121.954,13.363
xFCLK: IC3.11 R52.2 | length 20.4
  Bottom Layer w0.152: R52.2@87.02,52.377 93.775,52.377 95.847,50.305 99.504,50.305 99.822,49.987 99.822,49.073 99.974,48.92 IC3.11@105.468,48.92
xLock: R63.1 SK1.C19 | length 5
  Top Layer w0.152: R63.1@75.895,15.496 76.007,15.384 SK1.C19@76.007,10.541
xMreqN: R50.1 SK1.C13 | length 5
  Top Layer w0.152: SK1.C13@91.288,10.582 R50.1@91.288,15.496
  Top Layer w0.254: SK1.C13@91.247,10.541 SK1.C13@91.288,10.582
xnBW: R60.1 SK1.C22 | length 5
  Top Layer w0.152: R60.1@68.275,15.496 68.387,15.384 SK1.C22@68.387,10.541
xnRW: R56.1 SK1.C10 | length 5
  Top Layer w0.152: SK1.C10@98.867,10.541 R56.1@98.867,15.456
  Top Layer w0.254: R56.1@98.867,15.456 R56.1@98.908,15.496
xSeq: R40.1 SK1.C11 | length 5
  Top Layer w0.152: SK1.C11@96.327,10.541 R40.1@96.327,15.334
  Top Layer w0.254: R40.1@96.164,15.496 R40.1@96.327,15.334
xSpvmd: R78.1 SK1.C14 | length 65.5
  Top Layer w0.152: SK1.C14@88.707,10.541 88.707,10.221 87.63,9.144 87.63,4.267 88.849,3.048 123.749,3.048 124.206,3.505 124.206,8.687 124.358,8.839 128.016,8.839 128.473,9.296 128.473,18.136 128.168,18.44 126.949,18.44 126.644,18.745 R78.1@126.644,19.611
pads on no net: IC1.48 IC1.54 IC1.55 IC1.56 IC1.57 IC1.58 IC1.62 IC1.109 IC1.110 IC1.111 IC1.114 IC1.115 IC1.116 IC1.118 IC1.119 IC1.120 IC1.133 IC1.134 IC1.135 IC2.3 IC2.8 IC2.11 IC3.3 IC3.6 IC3.8 IC5.6 IC5.8 IC5.11 IC9.8 IC9.9 SK1.C5 SK1.C18 SK1.MH1 SK1.MH2 X1.1

## Polygon pours and split planes (outlines as drawn)
5V on 5V "5V_L02_P003" (solid, pour order 3): -0.055,-0.035 130.4,-0.035 130.4,60.163 -0.055,60.163
5V on 5V "NONET_L-01_P-001" (solid, shelved, pour order 0): 0,0 130.454,0 130.454,60.198 0,60.198
GND on GND "GND_L03_P004" (solid, pour order 4): 0,0 130.454,0 130.454,60.198 0,60.198
GND on GND "NONET_L-01_P-001" (solid, shelved, pour order 1): 0,0 130.454,0 130.454,60.198 0,60.198
GND on Bottom Layer "GND_L04_P005" (solid, remove dead copper, pour order 5): -0.055,0.016 130.4,0.016 130.4,60.214 -0.055,60.214
GND on Top Layer "GND_L01_P002" (solid, remove dead copper, pour order 2): 0,0 130.454,0 130.454,60.198 0,60.198

## Keep-outs
Keep-Out Layer:
  the board outline again, w1.2

## Silkscreen, mask and mechanical layers (free items; w line width, h text height)
Top Overlay:
  text "S  A" at 20.371,53.899 h1.52
  text "A540/R260" at 91.542,36.525 h1.14
  text "ARM 610/710" at 91.542,34.696 h1.14
  text "S  A" at 1.93,19.558 h1.52 r270
  text "32" at 42.012,13.208 h1.14
  text "1" at 121.564,12.598 h1.14
  text "C" at 128.575,10.008 h1.14
  text "B" at 128.575,7.722 h1.14
  text "A" at 128.575,5.436 h1.14
Board Shape:
  the board outline again, w1.2